# Altium PCB Untitled1.PcbDoc
Units mil, origin at the board's own origin, x right, y up, seen from the top; angles counter-clockwise.
Board outline 4791.34 x 3826.77 mil, 2 copper layers (Top Layer, Top, Bottom Layer, Bottom); 16 components, 9 nets, 94 pads, 0 vias.
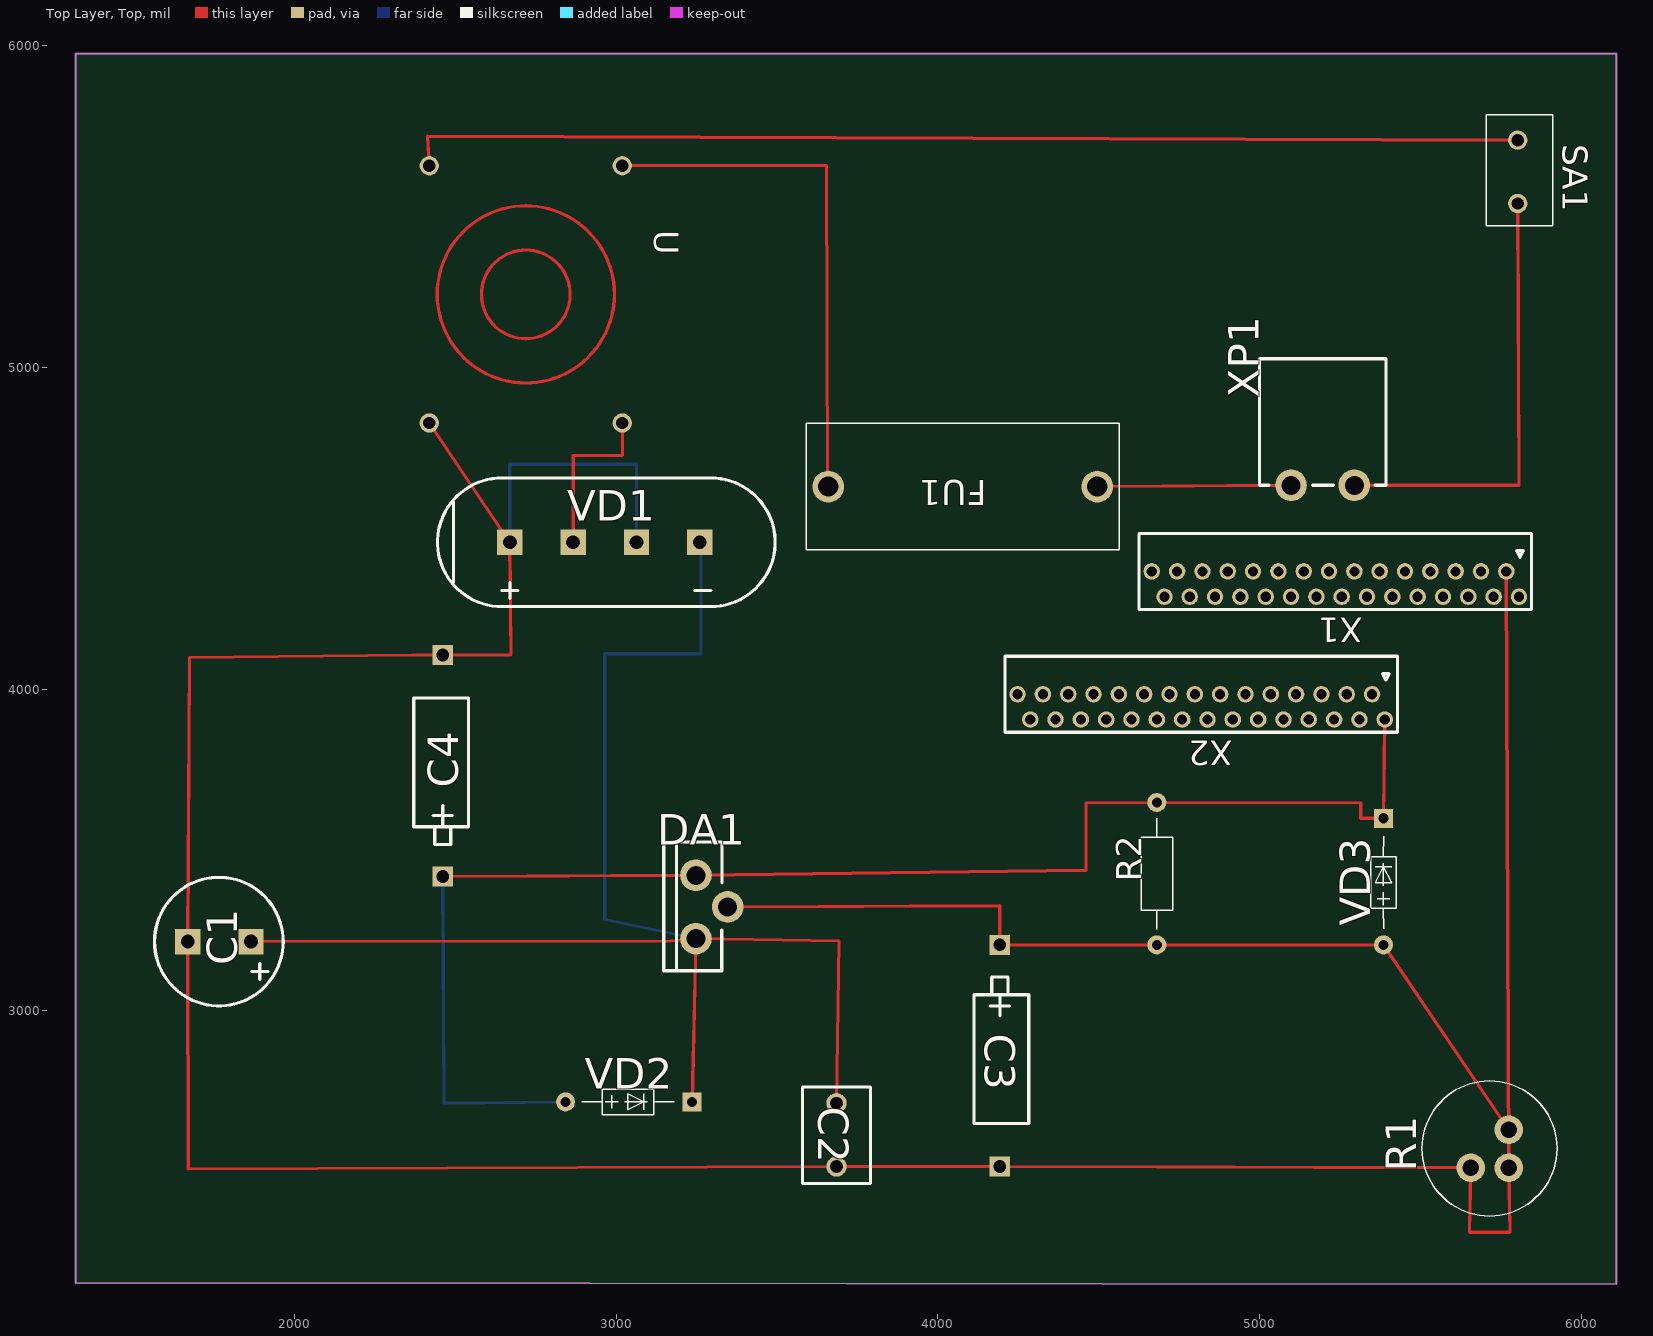
[diagram p0: Top Layer, Top view]
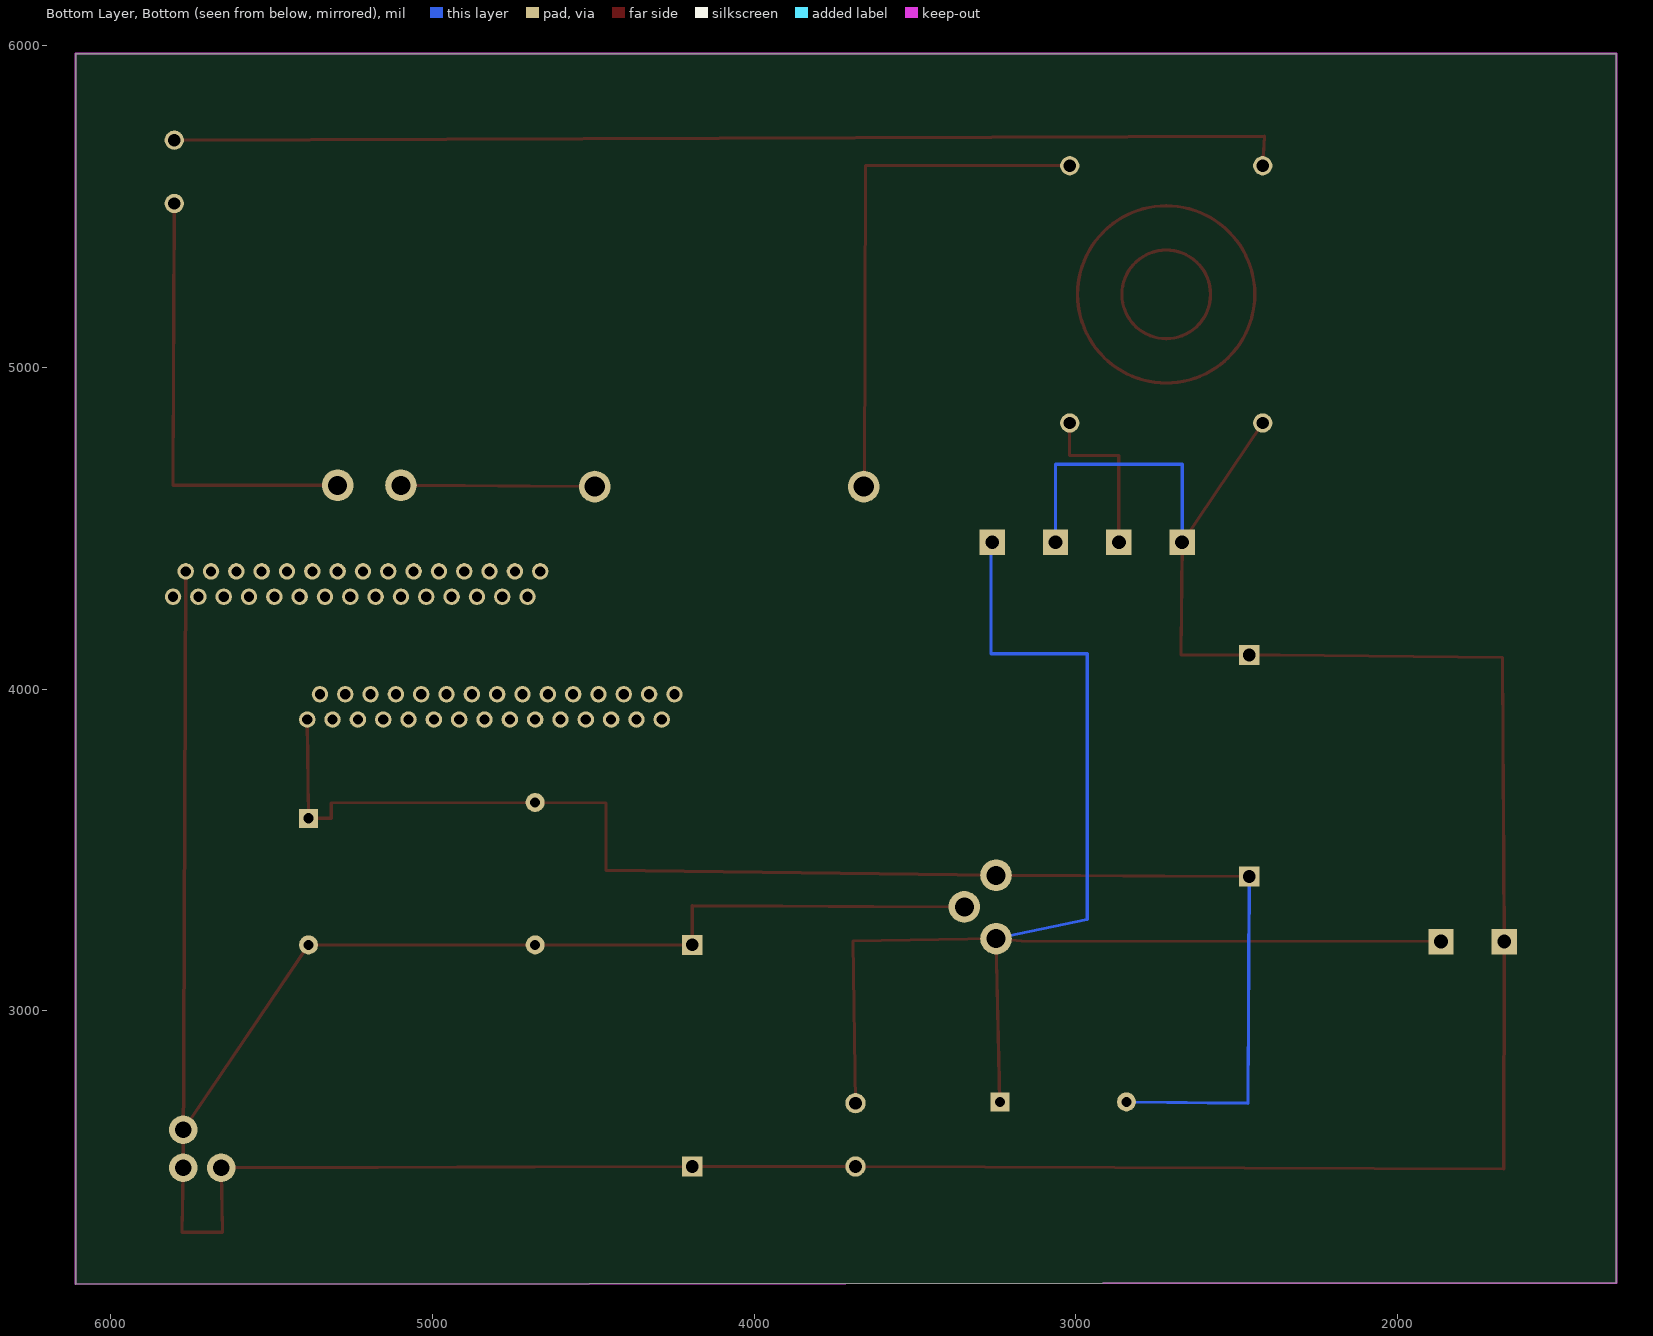
[diagram p1: Bottom Layer, Bottom view, seen from below]

## Layer stack, top to bottom
Top Solder, Top Mask: solder mask 0.4, Solder Resist, Dk 3.5
Top Layer, Top: signal copper 1.4
Dielectric 1: dielectric 12.6, FR-4, Dk 4.8
Bottom Layer, Bottom: signal copper 1.4
Bottom Solder, Bot Mask: solder mask 0.4, Solder Resist, Dk 3.5

## Board outline
6110.24,5976.38 1322.83,5976.38 1318.9,5976.38 1318.9,2153.54 6110.24,2149.61

## Design rules (kind name [scope] priority, off if disabled: settings)
Clearance [All] p1: gap=10 ignorepadtopadclearanceinfootprint=FALSE except(0: Arc-Hole Track-Hole SMDPad-Hole THPad-Hole Via-Hole Fill-Hole Poly-Hole Region-Hole Text-Hole; 11.81: Arc-Arc Arc-Track Arc-THPad Arc-Via Track-Track Track-THPad Track-Via THPad-THPad THPad-Via Via-Via)
PlaneClearance [All] p1: clearance=10
PolygonConnect [All] p1: connectstyle=Relief reliefconductorwidth=10 reliefentries=4 polygonreliefangle="90 Angle" airgapwidth=10
RoutingVias [All] p1: holewidth=28 width=50 viastyle="Through Hole" minholewidth=28 minwidth=50 maxholewidth=28 maxwidth=50
SolderMaskExpansion [All] p1: expansion=4 istentingtop=FALSE
Width [All] p1: maxlimit=10 minlimit=10 preferedwidth=10
29 further rules are at their usual default settings.

## Components (designator, comment, footprint, x,y, rotation, side; value= is the part's Value field where it differs from the comment)
C1 "1000mk" K5035-3_Primary 1864.57,3214.96 r90 top
C2 "0,1mk" K1047-1 3685.04,2712.6 r270 top
C3 "10mk" K534A-2 4192.91,3204.72 r270 top
C4 "22mk" K534A-2 2460.63,3417.32 r90 top
DA1 "" KR142EN_КР142ЕНB(Primary) 3248.03,3224.41 r0 top
FU1 "0,25A" FH-101C 4496.06,4629.92 r180 top
R1 "4,7k" SP5-16-025 5775.59,2511.81 r90 top
R2 "240" C2-33H-0.125W 4681.1,3204.72 r90 top
SA1 "" 8AS9M2RE 5803.15,5707.09 r270 top
U "T1" T 2700.79,5222.83 r270 top
VD1 "" KC412 2669.29,4456.69 r0 top
VD2 "" КД521(522)_КД522Б(Primary) 3236.22,2716.54 r0 top
VD3 "" КД521(522)_КД522Б(Primary) 5385.83,3598.43 r90 top
X1 "\"-\"" 30FMN 4665.35,4366.14 r180 top
X2 "\"+\"" 30FMN 4248.03,3984.25 r180 top
XP1 "~~220B" 2XR 5295.28,4633.86 r90 top

## Footprints (in the part's own frame and the unit in brackets; to place one, negate y for a bottom-side part, rotate by r counter-clockwise, add the part's x,y. Pads: shape width x height; smd on the part's side, far side on the other; paste and mask are expansions set on the pad)
2XR [mm]
  round 2.5 hole 1.5: 1(0,0) 2(0,5)
  silkscreen extent 0,-2.5 10,7.5
8AS9M2RE [mil]
  round 60 hole 38: 1(0,0) 2(196.85,0)
  silkscreen extent -79,-98 266,108
30FMN [mm]
  round 1.3 hole 0.8: 1(-29,2) 2(-28,0) 3(-27,2) 4(-26,0) 5(-25,2) 6(-24,0) 7(-23,2) 8(-22,0) 9(-21,2) 10(-20,0) 11(-19,2) 12(-18,0) 13(-17,2) 14(-16,0) 15(-15,2) 16(-14,0) 17(-13,2) 18(-12,0) 19(-11,2) 20(-10,0) 21(-9,2) 22(-8,0) 23(-7,2) 24(-6,0) 25(-5,2) 26(-4,0) 27(-3,2) 28(-2,0) 29(-1,2) 30(0,0)
  silkscreen extent -30,-3 1,3
C2-33H-0.125W [mm]
  round 1.5 hole 0.8: 1(0,0) 2(11.25,0)
  silkscreen extent 1.25,-1.25 10,1.25
FH-101C [mm]
  round 2.5 hole 1.6: 1(0,0) 2(21.25,0)
  silkscreen extent -1.75,-5 23,5
K534A-2 [mm]
  rect 1.6x1.6 hole 1: 1(0,0) 2(17.5,0)
  silkscreen extent 2.54,-2.03 14.1,2.29
K1047-1 [mm]
  round 1.6 hole 1: 1(0,0) 2(5,0)
  silkscreen extent -1.27,-2.69 6.35,2.69
K5035-3_Primary [mm]
  rect 2x2 hole 1.1: 1(0,0) 2(0,5)
  silkscreen extent -5.08,-2.54 5.08,7.62
KC412 [mm]
  rect 2x2 hole 1.1: 1(0,0) 2(5,0) 3(15,0) 4(10,0)
  silkscreen extent -5.71,-5.08 20.95,5.08
KR142EN_КР142ЕНB(Primary) [mm]
  round 2.5 hole 1.5: 2(0,0) 8(0,5) 17(2.5,2.5)
  silkscreen extent -2.54,-2.56 2.06,7.62
SP5-16-025 [mm]
  round 2.25 hole 1.3: 1(3,0) 2(0,0) 3(0,3)
  silkscreen extent -3.81,-3.81 6.86,6.86
T [mil]
  round 60 hole 38: 1(-404.72,318.11) 2(-404.72,-281.89) 3(395.28,318.11) 4(395.28,-281.89)
  Top Layer, Top circle w10: c-4.72,18.11 r275.59
  Top Layer, Top circle w10: c-4.72,18.11 r137.8
КД521(522)_КД522Б(Primary) [mm]
  round 1.5 hole 0.8: 1(-10,0)
  rect 1.5x1.5 hole 0.8: 2(0,0)
  silkscreen extent -8.71,-1.02 -1.4,1.02

## Nets (pads, with @x,y where several pads share a name; then routed paths per layer and width w, separated by ;. In a path a pad name is that pad's centre, name@x,y a point inside that pad or via, vN(x,y) a via of type N, cw(c..) or ccw(c..) an arc to the next point about the centre after c; other vN are vias at no path point)
NET00000: FU1.1 XP1.2 | length 602.4
  Top Layer, Top w10: FU1.1 XP1.2
NET00001: SA1.2 XP1.1 | length 1388.2
  Top Layer, Top w10: XP1.1 5807.09,4633.86 SA1.2
NET00002: U.3 VD1.2 | length 524.5
  Top Layer, Top w10: VD1.2 2866.14,4726.77 3019.68,4726.77 3019.68,4825.2 U.3
NET00003: SA1.1 U.2 | length 3481.3
  Top Layer, Top w10: U.2 2413.39,5718.9 SA1.1
NET00005: C1.2 C2.2 C3.2 C4.2 R1.2 R1.3 U.4 VD1.1 VD1.4 X1.2 | length 10637.9
  Top Layer, Top w10: C1.2 C1.2@1667.55,3215.37 ; U.4 VD1.1 2673.23,4106.3 C4.2 2366.14,4106.3 1673.23,4098.43 C1.2@1667.55,3215.37 ; X1.2 R1.2 5779.53,2311.02 5653.54,2311.02 R1.3 C3.2 C2.2 1669.29,2507.87 C1.2@1667.55,3215.37
  Bottom Layer, Bottom w10: VD1.1 2669.29,4699.21 3062.99,4699.21 VD1.4
NET00006: FU1.2 U.1 | length 1635
  Top Layer, Top w10: U.1 3653.54,5628.35 3657.48,4629.92 FU1.2
NET00009: C1.1 C2.1 DA1.2 VD1.3 VD2.2 | length 4606.7
  Top Layer, Top w10: C1.1 3169.29,3216.54 DA1.2 ; VD2.2 DA1.2 ; C2.1 3692.91,3216.54 DA1.2
  Bottom Layer, Bottom w10: DA1.2 2964.57,3283.46 2964.57,4110.24 3263.78,4110.24 3263.78,4456.69 VD1.3
NET00012: C3.1 DA1.17 R1.1 R2.1 VD3.1 | length 2855.9
  Top Layer, Top w10: DA1.17 4192.91,3326.77 C3.1 R2.1 VD3.1 R1.1
NET00015: C4.1 DA1.8 R2.2 VD2.1 VD3.2 X2.1 | length 4571
  Top Layer, Top w10: C4.1 DA1.8 4460.63,3437.01 4460.63,3645.67 R2.2 5314.96,3645.67 5314.96,3598.43 VD3.2 X2.1
  Bottom Layer, Bottom w10: C4.1 2464.57,2712.6 VD2.1
pads on no net: X1.1 X1.3 X1.4 X1.5 X1.6 X1.7 X1.8 X1.9 X1.10 X1.11 X1.12 X1.13 X1.14 X1.15 X1.16 X1.17 X1.18 X1.19 X1.20 X1.21 X1.22 X1.23 X1.24 X1.25 X1.26 X1.27 X1.28 X1.29 X1.30 X2.2 X2.3 X2.4 X2.5 X2.6 X2.7 X2.8 X2.9 X2.10 X2.11 X2.12 X2.13 X2.14 X2.15 X2.16 X2.17 X2.18 X2.19 X2.20 X2.21 X2.22 X2.23 X2.24 X2.25 X2.26 X2.27 X2.28 X2.29 X2.30

## Keep-outs
Keep-Out Layer, Board:
  the board outline again, w5

## Text inside footprints (layer, text, board x,y; h text height)
DA1: Mechanical 1, Top Assy "1" at 3332.25,3124.41 h125 r90